# Altium PCB pcb.PcbDoc (part 5 of 6)
Units mm, origin at the board's own origin, x right, y up, seen from the top; angles counter-clockwise.
Board outline 85.44 x 182.72 mm, 2 copper layers (Top Layer, Bottom Layer); 68 components, 54 nets, 232 pads, 184 vias.
Unrouted connection lines stored in the file: 53.
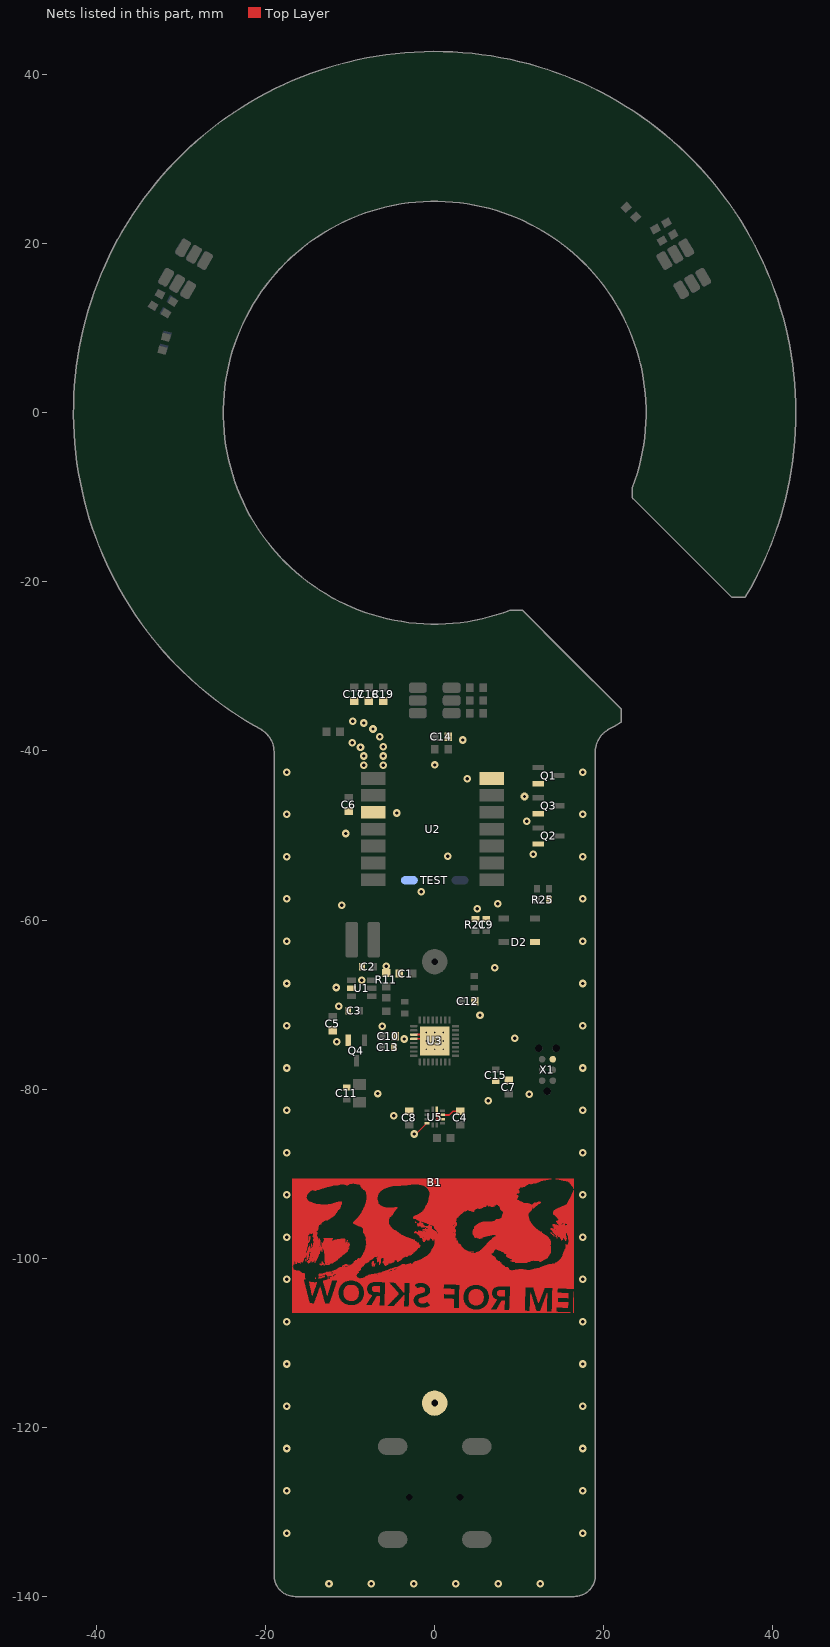
[diagram p5: the nets of this part, all layers, seen from the top]

## Via types
v1: diameter 0.9, hole 0.4, Top Layer to Bottom Layer, 143 vias
v2: diameter 1.27, hole 0.7, Top Layer to Bottom Layer, 32 vias
v3: diameter 0.5, hole 0.2, Top Layer to Bottom Layer, 9 vias

## Nets (pads, with @x,y where several pads share a name; then routed paths per layer and width w, separated by ;. In a path a pad name is that pad's centre, name@x,y a point inside that pad or via, vN(x,y) a via of type N, cw(c..) or ccw(c..) an arc to the next point about the centre after c; other vN are vias at no path point) (continued)
GND: (continued)
  Top Layer w0.025: 6.431,-98.035 13.721,-98.035 ; 6.456,-98.009 13.695,-98.009 ; 6.456,-93.691 7.066,-93.691 ; 6.482,-97.984 13.695,-97.984 ; 6.482,-93.717 7.066,-93.717 ; 6.507,-97.958 13.695,-97.958 ; 6.507,-93.742 7.066,-93.742 ; 6.533,-97.933 13.67,-97.933 ; 6.533,-93.767 7.066,-93.767 ; 6.558,-97.908 13.67,-97.908 ; 6.583,-97.882 13.67,-97.882 ; 6.609,-97.857 13.645,-97.857 ; 6.609,-93.793 7.041,-93.793 ; 6.66,-97.831 13.645,-97.831 ; 6.685,-97.806 13.619,-97.806 ; 6.71,-99.33 6.812,-99.33 ; 6.71,-93.818 6.888,-93.818 ; 6.736,-99.355 6.787,-99.355 ; 6.736,-99.305 6.837,-99.305 ; 6.736,-97.781 13.594,-97.781 ; 6.761,-99.279 6.914,-99.279 ; 6.761,-99.254 6.914,-99.254 ; 6.761,-99.228 6.939,-99.228 ; 6.761,-99.203 6.939,-99.203 ; 6.761,-97.755 13.594,-97.755 ; 6.761,-93.844 6.888,-93.844 ; 6.787,-97.73 13.568,-97.73 ; 6.787,-97.704 13.543,-97.704 ; 6.812,-97.679 13.518,-97.679 ; 6.812,-97.654 13.492,-97.654 ; 6.812,-97.628 13.492,-97.628 ; 6.837,-97.603 13.467,-97.603 ; 6.837,-93.869 6.888,-93.869 ; 6.888,-97.577 13.467,-97.577 ; 6.888,-95.647 11.282,-95.647 ; 6.914,-97.552 13.441,-97.552 ; 6.964,-97.527 13.416,-97.527 ; 6.964,-93.818 7.041,-93.818 ; 6.99,-97.501 13.391,-97.501 ; 6.99,-95.622 11.257,-95.622 ; 7.041,-97.476 13.391,-97.476 ; 7.066,-95.596 11.257,-95.596 ; 7.091,-95.571 11.232,-95.571 ; 7.117,-97.45 13.365,-97.45 ; 7.117,-93.64 7.218,-93.64 ; 7.142,-95.545 11.232,-95.545 ; 7.142,-93.666 7.168,-93.666 ; 7.168,-95.52 11.206,-95.52 ; 7.193,-95.495 11.206,-95.495 ; 7.218,-97.425 13.34,-97.425 ; 7.218,-97.323 13.187,-97.323 ; 7.218,-97.298 13.137,-97.298 ; 7.218,-95.469 11.206,-95.469 ; 7.244,-97.349 13.238,-97.349 ; 7.244,-97.273 13.111,-97.273 ; 7.244,-97.196 12.959,-97.196 ; 7.244,-95.444 11.181,-95.444 ; 7.269,-97.374 13.264,-97.374 ; 7.269,-97.247 13.06,-97.247 ; 7.269,-95.418 11.181,-95.418 ; 7.295,-97.4 13.289,-97.4 ; 7.295,-97.222 13.01,-97.222 ; 7.295,-95.393 11.155,-95.393 ; 7.32,-106.086 8.234,-106.086 ; 7.32,-106.061 8.234,-106.061 ; 7.32,-98.898 13.721,-98.898 ; 7.345,-106.036 8.234,-106.036 ; 7.345,-95.368 7.447,-95.368 ; 7.345,-93.564 11.232,-93.564 ; 7.371,-106.01 8.234,-106.01 ; 7.371,-105.985 8.234,-105.985 ; 7.396,-105.959 8.234,-105.959 ; 7.396,-105.934 8.234,-105.934 ; 7.396,-104.207 8.285,-104.207 ; 7.396,-104.181 8.285,-104.181 ; 7.396,-104.156 8.285,-104.156 ; 7.396,-104.131 8.285,-104.131 ; 7.396,-104.105 8.285,-104.105 ; 7.396,-104.08 8.285,-104.08 ; 7.396,-104.054 8.285,-104.054 ; 7.396,-104.029 8.285,-104.029 ; 7.396,-104.004 8.285,-104.004 ; 7.396,-98.924 13.721,-98.924 ; 7.422,-105.909 8.234,-105.909 ; 7.422,-105.883 8.234,-105.883 ; 7.422,-104.258 8.285,-104.258 ; 7.422,-104.232 8.285,-104.232 ; 7.422,-103.978 8.285,-103.978 ; 7.422,-103.953 8.285,-103.953 ; 7.422,-93.59 11.308,-93.59 ; 7.447,-105.858 8.234,-105.858 ; 7.447,-104.283 8.285,-104.283 ; 7.447,-103.927 8.311,-103.927 ; 7.447,-98.949 13.721,-98.949 ; 7.472,-105.832 8.234,-105.832 ; 7.472,-105.807 8.234,-105.807 ; 7.472,-104.308 8.285,-104.308 ; 7.472,-103.902 8.311,-103.902 ; 7.472,-93.615 11.384,-93.615 ; 7.498,-105.782 8.234,-105.782 ; 7.498,-105.756 8.234,-105.756 ; 7.498,-104.334 8.285,-104.334 ; 7.498,-103.877 8.311,-103.877 ; 7.498,-93.691 11.435,-93.691 ; 7.498,-93.666 11.46,-93.666 ; 7.498,-93.64 11.46,-93.64 ; 7.523,-105.731 8.234,-105.731 ; 7.523,-105.705 8.234,-105.705 ; 7.523,-104.359 8.285,-104.359 ; 7.523,-103.851 8.311,-103.851 ; 7.523,-98.974 13.721,-98.974 ; 7.523,-93.717 11.435,-93.717 ; 7.549,-105.68 8.234,-105.68 ; 7.549,-105.655 8.234,-105.655 ; 7.574,-105.629 8.234,-105.629 ; 7.574,-104.385 8.285,-104.385 ; 7.574,-103.826 8.311,-103.826 ; 7.599,-105.604 8.234,-105.604 ; 7.599,-105.578 8.234,-105.578 ; 7.599,-99 13.721,-99 ; 7.599,-93.742 11.435,-93.742 ; 7.625,-105.553 8.234,-105.553 ; 7.625,-105.528 8.234,-105.528 ; 7.65,-105.502 8.234,-105.502 ; 7.65,-105.477 8.234,-105.477 ; 7.65,-104.41 8.285,-104.41 ; 7.65,-103.8 8.285,-103.8 ; 7.65,-95.368 11.155,-95.368 ; 7.65,-93.767 11.409,-93.767 ; 7.676,-105.451 8.234,-105.451 ; 7.676,-99.025 13.721,-99.025 ; 7.676,-93.818 11.384,-93.818 ; 7.676,-93.793 11.409,-93.793 ; 7.701,-105.426 8.234,-105.426 ; 7.701,-105.401 8.234,-105.401 ; 7.701,-95.342 11.155,-95.342 ; 7.701,-93.894 11.359,-93.894 ; 7.701,-93.869 11.359,-93.869 ; 7.701,-93.844 11.384,-93.844 ; 7.726,-105.375 8.26,-105.375 ; 7.726,-105.35 8.26,-105.35 ; 7.726,-99.051 13.721,-99.051 ; 7.726,-93.971 11.333,-93.971 ; 7.726,-93.945 11.333,-93.945 ; 7.726,-93.92 11.333,-93.92 ; 7.752,-105.324 8.26,-105.324 ; 7.752,-105.299 8.26,-105.299 ; 7.752,-95.317 11.13,-95.317 ; 7.752,-94.047 11.308,-94.047 ; 7.752,-94.021 11.308,-94.021 ; 7.752,-93.996 11.308,-93.996 ; 7.777,-105.274 8.26,-105.274 ; 7.777,-99.076 13.721,-99.076 ; 7.777,-94.123 11.282,-94.123 ; 7.777,-94.098 11.282,-94.098 ; 7.777,-94.072 11.282,-94.072 ; 7.803,-105.248 8.26,-105.248 ; 7.803,-105.223 8.26,-105.223 ; 7.803,-95.291 11.13,-95.291 ; 7.803,-94.174 11.282,-94.174 ; 7.803,-94.148 11.282,-94.148 ; 7.828,-105.197 8.26,-105.197 ; 7.828,-105.172 8.26,-105.172 ; 7.828,-95.266 11.13,-95.266 ; 7.828,-94.225 11.435,-94.225 ; 7.828,-94.199 11.46,-94.199 ; 7.853,-105.147 8.26,-105.147 ; 7.853,-105.121 8.26,-105.121 ; 7.853,-99.101 13.721,-99.101 ; 7.853,-94.25 11.435,-94.25 ; 7.879,-105.096 8.26,-105.096 ; 7.879,-95.241 11.13,-95.241 ; 7.879,-94.275 11.435,-94.275 ; 7.904,-105.07 8.26,-105.07 ; 7.904,-105.045 8.26,-105.045 ; 7.904,-99.127 13.695,-99.127 ; 7.904,-95.215 11.105,-95.215 ; 7.904,-95.19 11.105,-95.19 ; 7.93,-105.02 8.26,-105.02 ; 7.93,-104.994 8.26,-104.994 ; 7.93,-104.435 8.285,-104.435 ; 7.93,-95.164 11.105,-95.164 ; 7.93,-94.301 11.409,-94.301 ; 7.955,-99.152 13.695,-99.152 ; 7.955,-95.139 11.105,-95.139 ; 7.955,-95.114 11.105,-95.114 ; 7.98,-95.088 11.079,-95.088 ; 7.98,-95.063 11.079,-95.063 ; 7.98,-95.037 11.079,-95.037 ; 7.98,-95.012 11.079,-95.012 ; 7.98,-94.987 11.079,-94.987 ; 7.98,-94.961 11.054,-94.961 ; 7.98,-94.936 11.054,-94.936 ; 7.98,-94.91 11.054,-94.91 ; 7.98,-94.326 11.384,-94.326 ; 8.006,-94.885 11.054,-94.885 ; 8.006,-94.86 11.054,-94.86 ; 8.006,-94.834 11.054,-94.834 ; 8.006,-94.352 11.333,-94.352 ; 8.031,-99.178 13.695,-99.178 ; 8.031,-94.809 11.054,-94.809 ; 8.031,-94.783 11.054,-94.783 ; 8.057,-94.758 11.054,-94.758 ; 8.057,-94.733 11.054,-94.733 ; 8.057,-94.707 11.054,-94.707 ; 8.057,-94.377 11.282,-94.377 ; 8.082,-94.682 11.079,-94.682 ; 8.082,-94.656 11.079,-94.656 ; 8.082,-94.631 11.079,-94.631 ; 8.082,-94.402 11.232,-94.402 ; 8.107,-99.203 13.695,-99.203 ; 8.107,-94.606 11.105,-94.606 ; 8.107,-94.58 11.105,-94.58 ; 8.107,-94.555 11.13,-94.555 ; 8.107,-94.529 11.155,-94.529 ; 8.107,-94.504 11.155,-94.504 ; 8.107,-94.479 11.181,-94.479 ; 8.107,-94.453 11.206,-94.453 ; 8.107,-94.428 11.232,-94.428 ; 8.234,-99.355 13.67,-99.355 ; 8.234,-99.33 13.67,-99.33 ; 8.234,-99.305 13.695,-99.305 ; 8.234,-99.279 13.721,-99.279 ; 8.26,-99.381 8.59,-99.381 ; 8.285,-99.406 8.539,-99.406 ; 8.285,-99.254 13.721,-99.254 ; 8.311,-99.432 8.412,-99.432 ; 8.311,-99.228 13.695,-99.228 ; 8.336,-103.267 16.464,-103.267 ; 8.488,-101.032 8.539,-101.032 ; 8.488,-99.711 13.441,-99.711 ; 8.488,-99.686 13.441,-99.686 ; 8.488,-99.66 13.467,-99.66 ; 8.488,-99.635 13.492,-99.635 ; 8.488,-99.609 13.492,-99.609 ; 8.488,-99.584 13.543,-99.584 ; 8.514,-101.057 8.565,-101.057 ; 8.514,-99.736 13.416,-99.736 ; 8.514,-99.559 13.568,-99.559 ; 8.539,-101.083 8.615,-101.083 ; 8.539,-99.533 13.568,-99.533 ; 8.539,-99.508 13.568,-99.508 ; 8.565,-99.762 13.416,-99.762 ; 8.565,-99.482 13.594,-99.482 ; 8.565,-99.457 13.594,-99.457 ; 8.59,-101.108 8.666,-101.108 ; 8.59,-99.787 13.391,-99.787 ; 8.59,-99.432 13.619,-99.432 ; 8.59,-99.406 13.645,-99.406 ; 8.615,-99.838 13.365,-99.838 ; 8.615,-99.813 13.365,-99.813 ; 8.615,-99.381 13.645,-99.381 ; 8.641,-101.133 8.717,-101.133 ; 8.641,-99.863 13.34,-99.863 ; 8.692,-101.159 8.742,-101.159 ; 8.793,-99.889 13.314,-99.889 ; 8.819,-99.94 13.264,-99.94 ; 8.819,-99.914 13.289,-99.914 ; 8.844,-106.137 10.622,-106.137 ; 8.844,-106.112 10.622,-106.112 ; 8.844,-106.086 10.622,-106.086 ; 8.844,-106.061 10.622,-106.061 ; 8.844,-106.036 10.622,-106.036 ; 8.844,-106.01 10.622,-106.01 ; 8.844,-105.985 10.622,-105.985 ; 8.844,-99.965 13.213,-99.965 ; 8.869,-105.959 10.622,-105.959 ; 8.869,-105.934 10.622,-105.934 ; 8.869,-105.909 10.622,-105.909 ; 8.869,-105.883 10.647,-105.883 ; 8.869,-105.858 10.647,-105.858 ; 8.869,-105.832 10.647,-105.832 ; 8.869,-105.807 10.647,-105.807 ; 8.869,-105.782 10.647,-105.782 ; 8.869,-105.756 10.647,-105.756 ; 8.869,-105.731 10.647,-105.731 ; 8.869,-105.705 10.647,-105.705 ; 8.869,-105.68 10.647,-105.68 ; 8.869,-105.655 10.647,-105.655 ; 8.869,-105.629 10.647,-105.629 ; 8.869,-105.604 10.647,-105.604 ; 8.869,-105.578 10.647,-105.578 ; 8.869,-105.553 10.647,-105.553 ; 8.869,-105.528 10.647,-105.528 ; 8.869,-105.502 10.647,-105.502 ; 8.869,-105.477 10.647,-105.477 ; 8.869,-105.451 10.647,-105.451 ; 8.869,-105.426 10.647,-105.426 ; 8.869,-105.401 10.647,-105.401 ; 8.869,-105.375 10.647,-105.375 ; 8.869,-105.35 10.647,-105.35 ; 8.869,-105.324 10.647,-105.324 ; 8.869,-105.299 10.647,-105.299 ; 8.869,-105.274 10.647,-105.274 ; 8.869,-105.248 10.647,-105.248 ; 8.895,-105.223 10.647,-105.223 ; 8.895,-105.197 10.647,-105.197 ; 8.895,-105.172 10.673,-105.172 ; 8.895,-105.147 10.673,-105.147 ; 8.895,-105.121 10.673,-105.121 ; 8.895,-105.096 10.673,-105.096 ; 8.895,-105.07 10.673,-105.07 ; 8.895,-105.045 10.673,-105.045 ; 8.895,-105.02 10.673,-105.02 ; 8.895,-104.994 10.673,-104.994 ; 8.895,-104.969 10.673,-104.969 ; 8.895,-104.943 10.673,-104.943 ; 8.895,-104.918 10.673,-104.918 ; 8.895,-104.893 10.673,-104.893 ; 8.895,-104.867 10.673,-104.867 ; 8.895,-104.842 10.673,-104.842 ; 8.895,-104.816 10.673,-104.816 ; 8.895,-104.791 10.673,-104.791 ; 8.895,-104.766 10.673,-104.766 ; 8.895,-104.74 10.673,-104.74 ; 8.895,-104.715 10.673,-104.715 ; 8.895,-104.689 10.673,-104.689 ; 8.895,-104.664 10.673,-104.664 ; 8.895,-104.639 10.673,-104.639 ; 8.895,-104.613 10.673,-104.613 ; 8.895,-104.588 10.673,-104.588 ; 8.895,-104.562 10.673,-104.562 ; 8.895,-104.537 10.673,-104.537 ; 8.895,-104.512 10.673,-104.512 ; 8.92,-104.486 10.673,-104.486 ; 8.92,-104.461 10.673,-104.461 ; 8.92,-104.435 10.698,-104.435 ; 8.92,-104.41 10.698,-104.41 ; 8.92,-104.385 10.698,-104.385 ; 8.92,-104.359 10.698,-104.359 ; 8.92,-104.334 10.698,-104.334 ; 8.92,-104.308 10.698,-104.308 ; 8.92,-104.283 10.698,-104.283 ; 8.92,-104.258 10.698,-104.258 ; 8.92,-104.232 10.698,-104.232 ; 8.92,-104.207 10.698,-104.207 ; 8.92,-104.181 10.698,-104.181 ; 8.92,-104.156 10.698,-104.156 ; 8.92,-104.131 10.698,-104.131 ; 8.92,-104.105 10.698,-104.105 ; 8.92,-104.08 10.698,-104.08 ; 8.92,-104.054 10.698,-104.054 ; 8.92,-104.029 10.698,-104.029 ; 8.92,-104.004 10.698,-104.004 ; 8.92,-103.978 10.698,-103.978 ; 8.92,-103.953 10.698,-103.953 ; 8.92,-103.927 10.698,-103.927 ; 8.92,-103.902 10.698,-103.902 ; 8.92,-103.877 10.698,-103.877 ; 8.92,-103.851 10.698,-103.851 ; 8.92,-103.826 10.698,-103.826 ; 8.92,-103.8 10.698,-103.8 ; 8.92,-99.99 13.187,-99.99 ; 8.946,-103.775 10.698,-103.775 ; 8.946,-103.75 10.698,-103.75 ; 8.946,-103.724 10.698,-103.724 ; 8.946,-103.699 10.724,-103.699 ; 8.946,-103.673 10.724,-103.673 ; 8.946,-103.648 10.724,-103.648 ; 8.946,-103.623 10.724,-103.623 ; 8.946,-103.597 10.724,-103.597 ; 8.946,-103.572 10.724,-103.572 ; 8.946,-103.546 10.724,-103.546 ; 8.946,-103.521 10.724,-103.521 ; 8.946,-103.496 10.724,-103.496 ; 8.946,-103.47 10.724,-103.47 ; 8.946,-103.445 10.724,-103.445 ; 8.946,-103.419 10.724,-103.419 ; 8.946,-103.394 10.724,-103.394 ; 8.946,-103.369 10.724,-103.369 ; 8.946,-103.343 16.464,-103.343 ; 8.946,-103.318 16.464,-103.318 ; 8.946,-103.292 16.464,-103.292 ; 9.022,-100.27 9.047,-100.27 ; 9.022,-100.244 9.047,-100.244 ; 9.022,-100.016 13.137,-100.016 ; 9.098,-100.295 9.327,-100.295 ; 9.098,-100.041 13.086,-100.041 ; 9.123,-100.27 11.384,-100.27 ; 9.149,-100.244 11.486,-100.244 ; 9.149,-100.219 11.613,-100.219 ; 9.149,-100.194 12.781,-100.194 ; 9.149,-100.168 12.806,-100.168 ; 9.149,-100.143 12.857,-100.143 ; 9.149,-100.117 12.908,-100.117 ; 9.149,-100.092 12.984,-100.092 ; 9.149,-100.067 13.06,-100.067 ; 9.174,-100.321 9.327,-100.321 ; 9.25,-101.387 9.276,-101.387 ; 9.25,-100.346 9.301,-100.346 ; 9.276,-101.413 9.327,-101.413 ; 9.352,-101.438 9.555,-101.438 ; 9.377,-101.464 16.464,-101.464 ; 9.403,-100.295 11.308,-100.295 ; 9.428,-100.321 11.232,-100.321 ; 9.454,-101.489 16.464,-101.489 ; 9.479,-100.346 11.155,-100.346 ; 9.504,-101.514 16.464,-101.514 ; 9.53,-100.371 11.079,-100.371 ; 9.555,-101.387 16.464,-101.387 ; 9.555,-101.362 10.825,-101.362 ; 9.555,-100.448 10.901,-100.448 ; 9.555,-100.422 10.978,-100.422 ; 9.555,-100.397 11.028,-100.397 ; 9.631,-101.413 16.464,-101.413 ; 9.657,-101.438 16.464,-101.438 ; 9.835,-100.473 10.47,-100.473 ; 9.86,-101.337 10.597,-101.337 ; 9.962,-101.311 10.47,-101.311 ; 10.114,-101.286 10.393,-101.286 ; 10.266,-91.558 10.317,-91.558 ; 11.257,-106.213 11.994,-106.213 ; 11.257,-106.188 11.994,-106.188 ; 11.257,-106.163 11.994,-106.163 ; 11.257,-106.137 11.968,-106.137 ; 11.257,-106.112 11.968,-106.112 ; 11.257,-106.086 11.968,-106.086 ; 11.257,-106.061 11.943,-106.061 ; 11.257,-106.036 11.943,-106.036 ; 11.257,-106.01 11.943,-106.01 ; 11.257,-105.985 11.917,-105.985 ; 11.257,-105.959 11.917,-105.959 ; 11.257,-105.934 11.917,-105.934 ; 11.257,-105.909 11.917,-105.909 ; 11.257,-105.883 11.892,-105.883 ; 11.257,-105.858 11.892,-105.858 ; 11.257,-105.832 11.892,-105.832 ; 11.257,-105.807 11.867,-105.807 ; 11.257,-105.782 11.867,-105.782 ; 11.257,-105.756 11.867,-105.756 ; 11.257,-103.369 16.464,-103.369 ; 11.257,-91.1 11.613,-91.1 ; 11.282,-105.731 11.841,-105.731 ; 11.282,-105.705 11.841,-105.705 ; 11.282,-105.68 11.841,-105.68 ; 11.282,-105.655 11.841,-105.655 ; 11.282,-105.629 11.816,-105.629 ; 11.282,-105.604 11.816,-105.604 ; 11.282,-105.578 11.816,-105.578 ; 11.282,-105.553 11.79,-105.553 ; 11.282,-105.528 11.79,-105.528 ; 11.282,-105.502 11.79,-105.502 ; 11.282,-105.477 11.765,-105.477 ; 11.282,-105.451 11.765,-105.451 ; 11.282,-105.426 11.765,-105.426 ; 11.282,-105.401 11.74,-105.401 ; 11.282,-105.375 11.74,-105.375 ; 11.282,-105.35 11.74,-105.35 ; 11.282,-105.324 11.74,-105.324 ; 11.282,-105.299 11.714,-105.299 ; 11.282,-105.274 11.714,-105.274 ; 11.282,-105.248 11.714,-105.248 ; 11.282,-105.223 11.689,-105.223 ; 11.282,-105.197 11.689,-105.197 ; 11.282,-105.172 11.689,-105.172 ; 11.282,-105.147 11.663,-105.147 ; 11.282,-105.121 11.663,-105.121 ; 11.282,-105.096 11.663,-105.096 ; 11.282,-105.07 11.663,-105.07 ; 11.282,-105.045 11.638,-105.045 ; 11.308,-105.02 11.638,-105.02 ; 11.308,-104.994 11.638,-104.994 ; 11.308,-104.969 11.613,-104.969 ; 11.308,-104.943 11.613,-104.943 ; 11.308,-104.918 11.613,-104.918 ; 11.308,-104.893 11.587,-104.893 ; 11.308,-104.867 11.587,-104.867 ; 11.308,-104.842 11.587,-104.842 ; 11.308,-104.816 11.562,-104.816 ; 11.308,-104.791 11.562,-104.791 ; 11.308,-104.766 11.562,-104.766 ; 11.308,-104.74 11.562,-104.74 ; 11.308,-104.715 11.536,-104.715 ; 11.308,-104.689 11.536,-104.689 ; 11.308,-104.664 11.536,-104.664 ; 11.308,-104.639 11.511,-104.639 ; 11.308,-104.613 11.511,-104.613 ; 11.308,-104.588 11.511,-104.588 ; 11.308,-104.562 11.486,-104.562 ; 11.308,-104.537 11.486,-104.537 ; 11.308,-104.512 11.486,-104.512 ; 11.308,-104.486 11.486,-104.486 ; 11.308,-104.461 11.46,-104.461 ; 11.308,-104.435 11.46,-104.435 ; 11.308,-104.41 11.46,-104.41 ; 11.308,-104.385 11.435,-104.385 ; 11.308,-104.359 11.435,-104.359 ; 11.308,-104.334 11.435,-104.334 ; 11.308,-104.308 11.409,-104.308 ; 11.308,-94.174 11.46,-94.174 ; 11.308,-94.148 11.486,-94.148 ; 11.308,-91.126 11.536,-91.126 ; 11.333,-104.283 11.409,-104.283 ; 11.333,-104.258 11.409,-104.258 ; 11.333,-104.232 11.409,-104.232 ; 11.333,-104.207 11.384,-104.207 ; 11.333,-104.181 11.384,-104.181 ; 11.333,-104.156 11.384,-104.156 ; 11.333,-104.131 11.359,-104.131 ; 11.333,-104.105 11.359,-104.105 ; 11.333,-104.08 11.359,-104.08 ; 11.333,-101.362 16.464,-101.362 ; 11.333,-94.123 11.486,-94.123 ; 11.333,-94.098 11.486,-94.098 ; 11.333,-94.072 11.511,-94.072 ; 11.359,-94.047 11.511,-94.047 ; 11.359,-94.021 11.536,-94.021 ; 11.359,-91.151 11.486,-91.151 ; 11.384,-93.996 11.536,-93.996 ; 11.384,-93.971 11.536,-93.971 ; 11.384,-91.177 11.435,-91.177 ; 11.409,-93.945 11.562,-93.945 ; 11.409,-93.92 11.562,-93.92 ; 11.409,-93.894 11.587,-93.894 ; 11.435,-93.869 11.841,-93.869 ; 11.435,-93.844 11.892,-93.844 ; 11.46,-101.337 16.464,-101.337 ; 11.46,-93.818 11.917,-93.818 ; 11.46,-93.793 11.943,-93.793 ; 11.486,-93.767 11.968,-93.767 ; 11.486,-93.742 12.019,-93.742 ; 11.511,-93.717 12.044,-93.717 ; 11.536,-93.691 12.07,-93.691 ; 11.536,-93.666 12.095,-93.666 ; 11.562,-93.64 12.146,-93.64 ; 11.587,-101.311 16.464,-101.311 ; 11.587,-93.615 12.171,-93.615 ; 11.613,-93.59 12.197,-93.59 ; 11.638,-93.894 11.816,-93.894 ; 11.638,-93.564 12.248,-93.564 ; 11.663,-103.394 16.464,-103.394 ; 11.663,-93.996 11.689,-93.996 ; 11.663,-93.971 11.74,-93.971 ; 11.663,-93.945 11.765,-93.945 ; 11.663,-93.92 11.79,-93.92 ; 11.663,-93.539 12.273,-93.539 ; 11.689,-103.47 12.984,-103.47 ; 11.689,-103.445 12.984,-103.445 ; 11.689,-103.419 16.464,-103.419 ; 11.689,-101.286 16.464,-101.286 ; 11.689,-93.513 12.324,-93.513 ; 11.714,-103.546 12.959,-103.546 ; 11.714,-103.521 12.959,-103.521 ; 11.714,-103.496 12.984,-103.496 ; 11.714,-100.219 12.756,-100.219 ; 11.714,-93.488 12.349,-93.488 ; 11.74,-103.623 12.933,-103.623 ; 11.74,-103.597 12.933,-103.597 ; 11.74,-103.572 12.933,-103.572 ; 11.74,-93.463 12.4,-93.463 ; 11.74,-91.075 11.943,-91.075 ; 11.765,-103.699 12.883,-103.699 ; 11.765,-103.673 12.908,-103.673 ; 11.765,-103.648 12.908,-103.648 ; 11.765,-100.244 12.044,-100.244 ; 11.79,-103.8 12.857,-103.8 ; 11.79,-103.775 12.857,-103.775 ; 11.79,-103.75 12.883,-103.75 ; 11.79,-103.724 12.883,-103.724 ; 11.79,-101.26 16.464,-101.26 ; 11.79,-93.437 12.425,-93.437 ; 11.816,-103.877 12.832,-103.877 ; 11.816,-103.851 12.832,-103.851 ; 11.816,-103.826 12.832,-103.826 ; 11.841,-103.953 12.781,-103.953 ; 11.841,-103.927 12.806,-103.927 ; 11.841,-103.902 12.806,-103.902 ; 11.867,-104.029 12.756,-104.029 ; 11.867,-104.004 12.781,-104.004 ; 11.867,-103.978 12.781,-103.978 ; 11.867,-93.412 12.476,-93.412 ; 11.892,-104.105 12.73,-104.105 ; 11.892,-104.08 12.73,-104.08 ; 11.892,-104.054 12.756,-104.054 ; 11.892,-101.235 16.464,-101.235 ; 11.917,-104.181 12.705,-104.181 ; 11.917,-104.156 12.705,-104.156 ; 11.917,-104.131 12.73,-104.131 ; 11.943,-104.258 12.679,-104.258 ; 11.943,-104.232 12.679,-104.232 ; 11.943,-104.207 12.705,-104.207 ; 11.968,-104.359 12.629,-104.359 ; 11.968,-104.334 12.654,-104.334 ; 11.968,-104.308 12.654,-104.308 ; 11.968,-104.283 12.654,-104.283 ; 11.994,-104.435 12.603,-104.435 ; 11.994,-104.41 12.603,-104.41 ; 11.994,-104.385 12.629,-104.385 ; 11.994,-101.21 16.464,-101.21 ; 12.019,-104.512 12.578,-104.512 ; 12.019,-104.486 12.578,-104.486 ; 12.019,-104.461 12.603,-104.461 ; 12.044,-104.588 12.552,-104.588 ; 12.044,-104.562 12.552,-104.562 ; 12.044,-104.537 12.552,-104.537 ; 12.07,-104.664 12.502,-104.664 ; 12.07,-104.639 12.527,-104.639 ; 12.07,-104.613 12.527,-104.613 ; 12.095,-104.74 12.476,-104.74 ; 12.095,-104.715 12.502,-104.715 ; 12.095,-104.689 12.502,-104.689 ; 12.095,-101.184 16.464,-101.184 ; 12.121,-104.842 12.451,-104.842 ; 12.121,-104.816 12.451,-104.816 ; 12.121,-104.791 12.451,-104.791 ; 12.121,-104.766 12.476,-104.766 ; 12.121,-93.386 12.527,-93.386 ; 12.146,-104.918 12.425,-104.918 ; 12.146,-104.893 12.425,-104.893 ; 12.146,-104.867 12.425,-104.867 ; 12.146,-93.361 12.552,-93.361 ; 12.171,-104.994 12.375,-104.994 ; 12.171,-104.969 12.4,-104.969 ; 12.171,-104.943 12.4,-104.943 ; 12.197,-105.07 12.349,-105.07 ; 12.197,-105.045 12.375,-105.045 ; 12.197,-105.02 12.375,-105.02 ; 12.197,-101.159 12.375,-101.159 ; 12.222,-105.147 12.324,-105.147 ; 12.222,-105.121 12.324,-105.121 ; 12.222,-105.096 12.349,-105.096 ; 12.222,-93.336 12.502,-93.336 ; 12.248,-105.223 12.298,-105.223 ; 12.248,-105.197 12.298,-105.197 ; 12.248,-105.172 12.324,-105.172 ; 12.273,-93.31 12.4,-93.31 ; 12.324,-100.244 12.73,-100.244 ; 12.375,-100.27 12.679,-100.27 ; 12.425,-100.295 12.603,-100.295 ; 12.451,-101.159 16.464,-101.159 ; 12.451,-101.133 16.464,-101.133 ; 12.451,-101.108 16.464,-101.108 ; 12.451,-100.321 12.527,-100.321 ; 12.476,-106.264 13.213,-106.264 ; 12.476,-101.083 16.464,-101.083 ; 12.502,-106.239 13.213,-106.239 ; 12.502,-106.213 13.213,-106.213 ; 12.527,-106.188 13.213,-106.188 ; 12.527,-106.163 13.213,-106.163 ; 12.527,-106.137 13.238,-106.137 ; 12.527,-101.057 16.464,-101.057 ; 12.552,-106.112 13.238,-106.112 ; 12.552,-106.086 13.238,-106.086 ; 12.578,-106.061 13.238,-106.061 ; 12.578,-106.036 13.238,-106.036 ; 12.578,-106.01 13.238,-106.01 ; 12.603,-105.985 13.238,-105.985 ; 12.603,-105.959 13.238,-105.959 ; 12.603,-105.934 13.238,-105.934 ; 12.603,-101.032 16.464,-101.032 ; 12.629,-105.909 13.238,-105.909 ; 12.629,-105.883 13.238,-105.883 ; 12.629,-96.866 12.654,-96.866 ; 12.654,-105.858 13.238,-105.858 ; 12.654,-105.832 13.238,-105.832 ; 12.654,-105.807 13.238,-105.807 ; 12.679,-105.782 13.238,-105.782 ; 12.679,-105.756 13.238,-105.756 ; 12.679,-105.731 13.238,-105.731 ; 12.679,-101.006 16.464,-101.006 ; 12.705,-105.705 13.238,-105.705 ; 12.705,-105.68 13.238,-105.68 ; 12.705,-105.655 13.238,-105.655 ; 12.73,-105.629 13.238,-105.629 ; 12.73,-105.604 13.238,-105.604 ; 12.73,-100.981 16.464,-100.981 ; 12.756,-105.578 13.238,-105.578 ; 12.756,-105.553 13.238,-105.553 ; 12.756,-105.528 13.238,-105.528 ; 12.781,-105.502 13.238,-105.502 ; 12.781,-105.477 13.238,-105.477 ; 12.781,-105.451 13.238,-105.451 ; 12.806,-105.426 13.238,-105.426 ; 12.806,-105.401 13.264,-105.401 ; 12.806,-100.956 16.464,-100.956 ; 12.832,-105.375 13.264,-105.375 ; 12.832,-105.35 13.264,-105.35 ; 12.832,-105.324 13.264,-105.324 ; 12.857,-105.299 13.264,-105.299 ; 12.857,-105.274 13.264,-105.274 ; 12.857,-105.248 13.264,-105.248 ; 12.883,-105.223 13.264,-105.223 ; 12.883,-105.197 13.264,-105.197 ; 12.883,-105.172 13.264,-105.172 ; 12.883,-100.93 16.464,-100.93 ; 12.908,-105.147 13.264,-105.147 ; 12.908,-105.121 13.264,-105.121 ; 12.933,-105.096 13.264,-105.096 ; 12.933,-105.07 13.264,-105.07 ; 12.933,-105.045 13.264,-105.045 ; 12.959,-105.02 13.264,-105.02 ; 12.959,-104.994 13.264,-104.994 ; 12.959,-104.969 13.264,-104.969 ; 12.959,-100.905 16.464,-100.905 ; 12.984,-104.943 13.264,-104.943 ; 12.984,-104.918 13.264,-104.918 ; 13.01,-104.893 13.264,-104.893 ; 13.01,-104.867 13.264,-104.867 ; 13.01,-104.842 13.264,-104.842 ; 13.035,-104.816 13.264,-104.816 ; 13.035,-104.791 13.264,-104.791 ; 13.035,-104.766 13.264,-104.766 ; 13.035,-100.879 16.464,-100.879 ; 13.06,-104.74 13.264,-104.74 ; 13.06,-104.715 13.264,-104.715 ; 13.086,-104.689 13.264,-104.689 ; 13.086,-104.664 13.289,-104.664 ; 13.086,-104.639 13.289,-104.639 ; 13.086,-100.854 16.464,-100.854 ; 13.111,-104.613 13.289,-104.613 ; 13.111,-104.588 13.289,-104.588 ; 13.111,-104.562 13.289,-104.562 ; 13.137,-104.537 13.289,-104.537 ; 13.137,-104.512 13.289,-104.512 ; 13.137,-104.486 13.289,-104.486 ; 13.162,-104.461 13.289,-104.461 ; 13.162,-104.435 13.289,-104.435 ; 13.162,-100.829 16.464,-100.829 ; 13.187,-104.41 13.289,-104.41 ; 13.187,-104.385 13.289,-104.385 ; 13.187,-104.359 13.289,-104.359 ; 13.213,-104.334 13.289,-104.334 ; 13.213,-104.308 13.289,-104.308 ; 13.213,-104.283 13.289,-104.283 ; 13.213,-100.803 16.464,-100.803 ; 13.238,-104.258 13.289,-104.258 ; 13.238,-104.232 13.289,-104.232 ; 13.264,-104.207 13.289,-104.207 ; 13.264,-104.181 13.289,-104.181 ; 13.264,-104.156 13.289,-104.156 ; 13.314,-100.778 13.391,-100.778 ; 13.416,-103.445 16.464,-103.445 ; 13.416,-100.778 16.464,-100.778 ; 13.441,-100.752 16.464,-100.752 ; 13.492,-100.727 16.464,-100.727 ; 13.492,-98.568 13.695,-98.568 ; 13.543,-100.702 16.464,-100.702 ; 13.594,-98.543 13.67,-98.543 ; 13.645,-100.676 16.464,-100.676 ; 13.721,-96.968 13.797,-96.968 ; 13.721,-96.511 14,-96.511 ; 13.721,-96.485 13.924,-96.485 ; 13.746,-96.993 13.797,-96.993 ; 13.746,-96.942 13.772,-96.942 ; 13.746,-96.536 14.102,-96.536 ; 13.746,-96.46 13.924,-96.46 ; 13.746,-96.434 13.924,-96.434 ; 13.772,-96.561 14.153,-96.561 ; 13.797,-97.019 13.822,-97.019 ; 13.822,-96.587 14.178,-96.587 ; 13.848,-106.315 14.356,-106.315 ; 13.848,-106.29 14.356,-106.29 ; 13.848,-106.264 14.356,-106.264 ; 13.848,-106.239 14.356,-106.239 ; 13.848,-106.213 14.356,-106.213 ; 13.848,-106.188 14.356,-106.188 ; 13.848,-106.163 14.356,-106.163 ; 13.848,-106.137 14.356,-106.137 ; 13.848,-106.112 14.356,-106.112 ; 13.848,-106.086 14.356,-106.086 ; 13.848,-106.061 14.356,-106.061 ; 13.848,-106.036 14.356,-106.036 ; 13.848,-106.01 14.356,-106.01 ; 13.848,-96.612 14.178,-96.612 ; 13.873,-105.985 14.356,-105.985 ; 13.873,-105.959 14.356,-105.959 ; 13.873,-105.934 14.356,-105.934 ; 13.873,-105.909 14.356,-105.909 ; 13.873,-105.883 14.381,-105.883 ; 13.873,-105.858 14.381,-105.858 ; 13.873,-105.832 14.381,-105.832 ; 13.873,-105.807 14.381,-105.807 ; 13.873,-105.782 14.381,-105.782 ; 13.873,-105.756 14.381,-105.756 ; 13.873,-105.731 15.753,-105.731 ; 13.873,-105.705 15.753,-105.705 ; 13.873,-105.68 15.753,-105.68 ; 13.873,-105.655 15.753,-105.655 ; 13.873,-105.629 15.753,-105.629 ; 13.873,-105.604 15.753,-105.604 ; 13.873,-105.578 15.753,-105.578 ; 13.873,-105.553 15.753,-105.553 ; 13.873,-105.528 15.753,-105.528 ; 13.873,-105.502 15.778,-105.502 ; 13.873,-105.477 15.778,-105.477 ; 13.873,-105.451 15.778,-105.451 ; 13.873,-105.426 15.778,-105.426 ; 13.873,-105.401 15.778,-105.401 ; 13.873,-105.375 15.778,-105.375 ; 13.873,-105.35 15.778,-105.35 ; 13.873,-105.324 15.778,-105.324 ; 13.873,-105.299 15.778,-105.299 ; 13.873,-105.274 15.778,-105.274 ; 13.873,-97.095 13.924,-97.095 ; 13.873,-96.638 14.178,-96.638 ; 13.899,-105.248 15.778,-105.248 ; 13.899,-105.223 15.778,-105.223 ; 13.899,-105.197 15.092,-105.197 ; 13.899,-105.172 14.534,-105.172 ; 13.899,-105.147 14.534,-105.147 ; 13.899,-105.121 14.534,-105.121 ; 13.899,-105.096 14.534,-105.096 ; 13.899,-105.07 14.534,-105.07 ; 13.899,-105.045 14.534,-105.045 ; 13.899,-105.02 14.534,-105.02 ; 13.899,-104.994 14.534,-104.994 ; 13.899,-104.969 14.534,-104.969 ; 13.899,-104.943 14.559,-104.943 ; 13.899,-104.918 14.559,-104.918 ; 13.899,-104.893 14.559,-104.893 ; 13.899,-104.867 14.559,-104.867 ; 13.899,-104.842 14.559,-104.842 ; 13.899,-104.816 14.559,-104.816 ; 13.899,-104.791 14.559,-104.791 ; 13.899,-104.766 14.559,-104.766 ; 13.899,-104.74 14.559,-104.74 ; 13.899,-104.715 14.559,-104.715 ; 13.899,-104.689 14.559,-104.689 ; 13.899,-104.664 14.559,-104.664 ; 13.899,-104.639 14.559,-104.639 ; 13.899,-104.613 14.559,-104.613 ; 13.899,-104.588 15.804,-104.588 ; 13.899,-104.562 15.804,-104.562 ; 13.899,-104.537 15.804,-104.537 ; 13.899,-97.146 13.949,-97.146 ; 13.899,-97.12 13.924,-97.12 ; 13.899,-96.663 14.178,-96.663 ; 13.924,-104.512 15.804,-104.512 ; 13.924,-104.486 15.804,-104.486 ; 13.924,-104.461 15.804,-104.461 ; 13.924,-104.435 15.804,-104.435 ; 13.924,-104.41 15.804,-104.41 ; 13.924,-104.385 15.804,-104.385 ; 13.924,-104.359 15.804,-104.359 ; 13.924,-104.334 15.804,-104.334 ; 13.924,-104.308 15.804,-104.308 ; 13.924,-104.283 15.804,-104.283 ; 13.924,-104.258 15.804,-104.258 ; 13.924,-104.232 15.804,-104.232 ; 13.924,-104.207 15.804,-104.207 ; 13.924,-104.181 15.804,-104.181 ; 13.924,-104.156 15.804,-104.156 ; 13.924,-104.131 15.804,-104.131 ; 13.924,-104.105 15.702,-104.105 ; 13.924,-104.08 14.965,-104.08 ; 13.924,-104.054 14.508,-104.054 ; 13.924,-104.029 14.508,-104.029 ; 13.924,-104.004 14.508,-104.004 ; 13.924,-103.978 14.508,-103.978 ; 13.924,-103.953 14.508,-103.953 ; 13.924,-103.927 14.508,-103.927 ; 13.924,-103.902 14.508,-103.902 ; 13.924,-103.877 14.508,-103.877 ; 13.924,-103.851 14.508,-103.851 ; 13.924,-103.826 14.508,-103.826 ; 13.924,-100.651 16.464,-100.651 ; 13.924,-96.688 15.829,-96.688 ; 13.949,-103.8 14.508,-103.8 ; 13.949,-103.775 14.508,-103.775 ; 13.949,-103.75 14.508,-103.75 ; 13.949,-103.724 14.508,-103.724 ; 13.949,-103.699 14.508,-103.699 ; 13.949,-103.673 14.508,-103.673 ; 13.949,-103.648 14.508,-103.648 ; 13.949,-103.623 14.508,-103.623 ; 13.949,-103.597 14.534,-103.597 ; 13.949,-103.572 14.534,-103.572 ; 13.949,-103.546 14.534,-103.546 ; 13.949,-103.521 14.534,-103.521 ; 13.949,-103.496 14.534,-103.496 ; 13.949,-103.47 16.464,-103.47 ; 13.949,-100.625 14.102,-100.625 ; 13.949,-96.714 15.829,-96.714 ; 13.949,-96.079 14.483,-96.079 ; 13.949,-96.053 14.432,-96.053 ; 13.949,-96.028 14.407,-96.028 ; 13.949,-96.003 14.203,-96.003 ; 13.949,-95.977 14.102,-95.977 ; 13.975,-96.866 14.076,-96.866 ; 13.975,-96.841 16.464,-96.841 ; 13.975,-96.765 16.464,-96.765 ; 13.975,-96.739 15.854,-96.739 ; 13.975,-96.13 14.61,-96.13 ; 13.975,-96.104 14.534,-96.104 ; 13.975,-95.952 14,-95.952 ; 14,-96.892 14.076,-96.892 ; 14,-96.815 16.464,-96.815 ; 14,-96.79 16.464,-96.79 ; 14,-96.155 14.737,-96.155 ; 14,-94.631 16.464,-94.631 ; 14,-94.606 16.464,-94.606 ; 14,-94.58 16.464,-94.58 ; 14,-94.555 16.464,-94.555 ; 14,-94.529 16.464,-94.529 ; 14,-94.504 16.464,-94.504 ; 14.026,-97.222 14.127,-97.222 ; 14.026,-97.196 14.102,-97.196 ; 14.026,-96.18 15.524,-96.18 ; 14.026,-94.707 16.464,-94.707 ; 14.026,-94.682 16.464,-94.682 ; 14.026,-94.656 16.464,-94.656 ; 14.026,-94.479 16.464,-94.479 ; 14.051,-97.273 14.127,-97.273 ; 14.051,-97.247 14.127,-97.247 ; 14.051,-97.171 14.076,-97.171 ; 14.051,-96.409 14.102,-96.409 ; 14.051,-96.206 15.55,-96.206 ; 14.051,-94.783 16.464,-94.783 ; 14.051,-94.758 16.464,-94.758 ; 14.051,-94.733 16.464,-94.733 ; 14.051,-94.453 16.464,-94.453 ; 14.051,-94.428 16.464,-94.428 ; 14.076,-97.323 14.127,-97.323 ; 14.076,-97.298 14.127,-97.298 ; 14.076,-96.434 14.102,-96.434 ; 14.076,-96.231 15.6,-96.231 ; 14.076,-94.834 14.102,-94.834 ; 14.076,-94.809 14.102,-94.809 ; 14.076,-94.402 16.464,-94.402 ; 14.102,-96.993 14.203,-96.993 ; 14.102,-96.968 14.153,-96.968 ; 14.102,-96.257 15.626,-96.257 ; 14.102,-94.377 16.464,-94.377 ; 14.127,-100.625 16.464,-100.625 ; 14.127,-97.019 14.229,-97.019 ; 14.127,-96.866 16.464,-96.866 ; 14.127,-96.46 14.407,-96.46 ; 14.127,-96.434 14.407,-96.434 ; 14.127,-96.282 15.804,-96.282 ; 14.127,-94.352 16.464,-94.352 ; 14.153,-96.485 15.27,-96.485 ; 14.153,-96.409 14.407,-96.409 ; 14.153,-96.384 14.407,-96.384 ; 14.153,-96.358 16.464,-96.358 ; 14.153,-96.333 15.88,-96.333 ; 14.153,-96.307 15.804,-96.307 ; 14.153,-94.809 16.464,-94.809 ; 14.153,-94.326 16.464,-94.326 ; 14.178,-97.044 15.473,-97.044 ; 14.178,-96.892 16.464,-96.892 ; 14.178,-94.834 16.464,-94.834 ; 14.178,-94.301 16.464,-94.301 ; 14.203,-96.917 16.464,-96.917 ; 14.203,-94.86 16.464,-94.86 ; 14.229,-100.6 16.464,-100.6 ; 14.229,-100.575 16.464,-100.575 ; 14.229,-97.095 15.473,-97.095 ; 14.229,-97.069 15.473,-97.069 ; 14.229,-96.942 15.6,-96.942 ; 14.229,-96.511 15.296,-96.511 ; 14.229,-94.885 16.464,-94.885 ; 14.229,-94.275 16.464,-94.275 ; 14.254,-97.12 15.473,-97.12 ; 14.254,-96.993 15.55,-96.993 ; 14.254,-96.968 15.575,-96.968 ; 14.254,-94.91 16.464,-94.91 ; 14.28,-100.549 16.464,-100.549 ; 14.28,-97.146 15.473,-97.146 ; 14.28,-97.019 15.499,-97.019 ; 14.28,-94.936 16.464,-94.936 ; 14.28,-94.25 16.464,-94.25 ; 14.305,-97.323 14.33,-97.323 ; 14.305,-97.171 14.356,-97.171 ; 14.305,-94.961 16.464,-94.961 ; 14.305,-90.592 16.464,-90.592 ; 14.33,-100.524 16.464,-100.524 ; 14.33,-97.374 14.381,-97.374 ; 14.33,-97.349 14.356,-97.349 ; 14.33,-96.536 15.321,-96.536 ; 14.33,-94.225 16.464,-94.225 ; 14.356,-97.4 14.407,-97.4 ; 14.356,-95.622 14.94,-95.622 ; 14.356,-94.987 16.464,-94.987 ; 14.356,-94.199 16.464,-94.199 ; 14.381,-100.498 16.464,-100.498 ; 14.381,-97.247 14.457,-97.247 ; 14.381,-97.222 14.508,-97.222 ; 14.381,-97.196 14.61,-97.196 ; 14.381,-97.171 15.473,-97.171 ; 14.381,-95.647 14.762,-95.647 ; 14.381,-95.596 14.915,-95.596 ; 14.381,-95.012 16.464,-95.012 ; 14.407,-96.663 15.804,-96.663 ; 14.407,-96.638 15.804,-96.638 ; 14.407,-96.612 15.346,-96.612 ; 14.407,-96.587 15.346,-96.587 ; 14.407,-96.561 15.321,-96.561 ; 14.407,-95.672 14.788,-95.672 ; 14.407,-95.037 16.464,-95.037 ; 14.407,-94.174 16.464,-94.174 ; 14.432,-100.473 16.464,-100.473 ; 14.432,-95.571 14.635,-95.571 ; 14.432,-95.063 16.464,-95.063 ; 14.457,-105.756 15.753,-105.756 ; 14.457,-97.552 14.483,-97.552 ; 14.457,-97.527 14.483,-97.527 ; 14.457,-96.46 15.245,-96.46 ; 14.457,-96.384 16.464,-96.384 ; 14.457,-95.698 15.067,-95.698 ; 14.457,-95.088 16.464,-95.088 ; 14.457,-94.148 16.464,-94.148 ; 14.483,-100.448 16.464,-100.448 ; 14.483,-96.409 15.245,-96.409 ; 14.483,-95.723 15.169,-95.723 ; 14.483,-95.164 16.464,-95.164 ; 14.483,-95.139 16.464,-95.139 ; 14.483,-95.114 16.464,-95.114 ; 14.508,-100.422 16.464,-100.422 ; 14.508,-96.434 15.245,-96.434 ; 14.508,-95.774 15.245,-95.774 ; 14.508,-95.749 15.219,-95.749 ; 14.508,-95.19 16.464,-95.19 ; 14.508,-94.123 16.464,-94.123 ; 14.534,-97.323 14.661,-97.323 ; 14.534,-97.222 14.61,-97.222 ; 14.534,-95.825 15.067,-95.825 ; 14.534,-95.799 15.296,-95.799 ; 14.534,-95.215 16.464,-95.215 ; 14.559,-100.397 16.464,-100.397 ; 14.559,-95.85 15.042,-95.85 ; 14.559,-94.098 16.464,-94.098 ; 14.559,-90.618 16.464,-90.618 ; 14.584,-100.371 16.464,-100.371 ; 14.584,-95.876 15.016,-95.876 ; 14.584,-95.241 14.661,-95.241 ; 14.61,-100.346 16.464,-100.346 ; 14.61,-97.349 14.686,-97.349 ; 14.61,-95.266 14.686,-95.266 ; 14.61,-94.072 16.464,-94.072 ; 14.635,-100.321 16.464,-100.321 ; 14.635,-97.374 14.711,-97.374 ; 14.635,-97.298 14.661,-97.298 ; 14.635,-95.901 14.965,-95.901 ; 14.635,-95.444 14.711,-95.444 ; 14.661,-100.295 16.464,-100.295 ; 14.661,-97.196 15.499,-97.196 ; 14.661,-95.571 14.915,-95.571 ; 14.661,-95.545 14.889,-95.545 ; 14.661,-95.469 14.762,-95.469 ; 14.661,-95.291 14.737,-95.291 ; 14.661,-94.047 16.464,-94.047 ; 14.686,-100.27 16.464,-100.27 ; 14.686,-97.247 15.499,-97.247 ; 14.686,-97.222 15.499,-97.222 ; 14.686,-96.053 14.737,-96.053 ; 14.686,-95.952 14.94,-95.952 ; 14.686,-95.926 14.94,-95.926 ; 14.686,-95.495 14.813,-95.495 ; 14.686,-95.317 16.464,-95.317 ; 14.711,-97.273 15.524,-97.273 ; 14.711,-96.079 14.737,-96.079 ; 14.711,-95.977 14.965,-95.977 ; 14.711,-95.241 16.464,-95.241 ; 14.737,-100.244 16.464,-100.244 ; 14.737,-97.323 15.448,-97.323 ; 14.737,-97.298 15.524,-97.298 ; 14.737,-96.104 14.762,-96.104 ; 14.737,-96.028 15.042,-96.028 ; 14.737,-96.003 14.991,-96.003 ; 14.737,-95.52 14.864,-95.52 ; 14.737,-95.342 16.464,-95.342 ; 14.737,-94.021 16.464,-94.021 ; 14.737,-90.643 16.464,-90.643 ; 14.762,-100.219 16.464,-100.219 ; 14.762,-97.374 15.143,-97.374 ; 14.762,-97.349 15.448,-97.349 ; 14.762,-96.155 15.499,-96.155 ; 14.762,-96.13 14.864,-96.13 ; 14.762,-95.368 16.464,-95.368 ; 14.762,-95.266 16.464,-95.266 ; 14.788,-100.194 16.464,-100.194 ; 14.788,-97.425 15.169,-97.425 ; 14.788,-97.4 15.143,-97.4 ; 14.788,-95.291 16.464,-95.291 ; 14.788,-93.996 16.464,-93.996 ; 14.813,-100.168 16.464,-100.168 ; 14.813,-97.45 15.169,-97.45 ; 14.813,-95.393 16.464,-95.393 ; 14.838,-100.143 16.464,-100.143 ; 14.838,-100.117 16.464,-100.117 ; 14.838,-97.501 15.194,-97.501 ; 14.838,-97.476 15.169,-97.476 ; 14.838,-96.053 15.372,-96.053 ; 14.838,-95.672 14.991,-95.672 ; 14.838,-95.647 14.965,-95.647 ; 14.838,-95.418 14.94,-95.418 ; 14.838,-93.971 16.464,-93.971 ; 14.864,-100.092 16.464,-100.092 ; 14.864,-97.552 15.118,-97.552 ; 14.864,-97.527 15.118,-97.527 ; 14.864,-96.104 15.448,-96.104 ; 14.864,-96.079 15.397,-96.079 ; 14.864,-90.669 16.464,-90.669 ; 14.889,-103.496 16.464,-103.496 ; 14.889,-100.067 16.464,-100.067 ; 14.889,-97.603 15.118,-97.603 ; 14.889,-97.577 15.118,-97.577 ; 14.889,-96.13 15.473,-96.13 ; 14.889,-95.444 14.94,-95.444 ; 14.915,-100.041 16.464,-100.041 ; 14.915,-97.628 15.118,-97.628 ; 14.915,-93.945 16.464,-93.945 ; 14.94,-100.016 16.464,-100.016 ; 14.94,-97.679 15.016,-97.679 ; 14.94,-97.654 15.118,-97.654 ; 14.965,-99.99 16.464,-99.99 ; 14.965,-99.965 16.464,-99.965 ; 14.965,-97.781 15.016,-97.781 ; 14.965,-97.704 14.991,-97.704 ; 14.965,-93.92 16.464,-93.92 ; 14.991,-104.613 15.804,-104.613 ; 14.991,-99.94 16.464,-99.94 ; 14.991,-95.545 16.464,-95.545 ; 14.991,-95.52 16.464,-95.52 ; 14.991,-90.694 16.464,-90.694 ; 15.016,-99.914 16.464,-99.914 ; 15.016,-99.889 16.464,-99.889 ; 15.016,-95.418 16.464,-95.418 ; 15.016,-93.894 16.464,-93.894 ; 15.042,-99.863 16.464,-99.863 ; 15.042,-97.704 15.118,-97.704 ; 15.042,-97.679 15.118,-97.679 ; 15.042,-95.571 16.464,-95.571 ; 15.042,-95.444 16.464,-95.444 ; 15.067,-99.838 16.464,-99.838 ; 15.067,-99.813 16.464,-99.813 ; 15.067,-97.755 15.118,-97.755 ; 15.067,-97.73 15.118,-97.73 ; 15.067,-95.469 16.464,-95.469 ; 15.092,-99.787 16.464,-99.787 ; 15.092,-99.762 16.464,-99.762 ; 15.092,-95.596 16.464,-95.596 ; 15.092,-95.495 16.464,-95.495 ; 15.092,-93.869 16.464,-93.869 ; 15.092,-90.719 16.464,-90.719 ; 15.118,-99.736 16.464,-99.736 ; 15.118,-99.711 16.464,-99.711 ; 15.118,-95.622 16.464,-95.622 ; 15.143,-99.686 16.464,-99.686 ; 15.143,-99.66 16.464,-99.66 ; 15.143,-99.635 16.464,-99.635 ; 15.143,-97.527 15.194,-97.527 ; 15.143,-96.028 15.321,-96.028 ; 15.143,-96.003 15.245,-96.003 ; 15.143,-95.825 15.321,-95.825 ; 15.143,-93.844 16.464,-93.844 ; 15.169,-105.782 15.753,-105.782 ; 15.169,-99.609 16.464,-99.609 ; 15.169,-99.584 16.464,-99.584 ; 15.169,-99.559 16.464,-99.559 ; 15.169,-99.533 16.464,-99.533 ; 15.169,-97.552 15.194,-97.552 ; 15.169,-95.647 16.464,-95.647 ; 15.194,-99.508 16.464,-99.508 ; 15.194,-99.482 16.464,-99.482 ; 15.194,-99.457 16.464,-99.457 ; 15.194,-99.432 16.464,-99.432 ; 15.194,-99.406 16.464,-99.406 ; 15.194,-97.4 15.448,-97.4 ; 15.194,-97.374 15.448,-97.374 ; 15.194,-90.745 16.464,-90.745 ; 15.219,-99.381 16.464,-99.381 ; 15.219,-99.355 16.464,-99.355 ; 15.219,-99.33 16.464,-99.33 ; 15.219,-97.425 15.473,-97.425 ; 15.219,-95.672 16.464,-95.672 ; 15.219,-93.818 16.464,-93.818 ; 15.245,-99.305 16.464,-99.305 ; 15.245,-99.279 16.464,-99.279 ; 15.245,-97.45 15.473,-97.45 ; 15.245,-95.85 15.346,-95.85 ; 15.27,-99.254 16.464,-99.254 ; 15.27,-99.228 16.464,-99.228 ; 15.27,-97.501 15.473,-97.501 ; 15.27,-97.476 15.473,-97.476 ; 15.27,-95.698 16.464,-95.698 ; 15.27,-93.793 16.464,-93.793 ; 15.296,-99.203 16.464,-99.203 ; 15.296,-99.178 16.464,-99.178 ; 15.296,-97.527 15.473,-97.527 ; 15.296,-96.409 16.464,-96.409 ; 15.296,-95.723 16.464,-95.723 ; 15.321,-99.152 16.464,-99.152 ; 15.321,-97.577 15.499,-97.577 ; 15.321,-97.552 15.499,-97.552 ; 15.321,-95.876 15.372,-95.876 ; 15.321,-93.767 16.464,-93.767 ; 15.346,-99.127 16.464,-99.127 ; 15.346,-99.101 16.464,-99.101 ; 15.346,-97.628 15.499,-97.628 ; 15.346,-97.603 15.499,-97.603 ; 15.346,-96.434 16.464,-96.434 ; 15.346,-95.901 15.397,-95.901 ; 15.346,-95.749 16.464,-95.749 ; 15.372,-99.076 16.464,-99.076 ; 15.372,-99.051 16.464,-99.051 ; 15.372,-99.025 16.464,-99.025 ; 15.372,-97.704 15.524,-97.704 ; 15.372,-97.679 15.524,-97.679 ; 15.372,-97.654 15.524,-97.654 ; 15.372,-96.46 16.464,-96.46 ; 15.372,-95.926 15.397,-95.926 ; 15.372,-90.77 16.464,-90.77 ; 15.397,-99 16.464,-99 ; 15.397,-98.974 16.464,-98.974 ; 15.397,-98.949 16.464,-98.949 ; 15.397,-97.755 15.55,-97.755 ; 15.397,-97.73 15.524,-97.73 ; 15.397,-96.612 15.778,-96.612 ; 15.397,-96.587 15.778,-96.587 ; 15.397,-96.561 16.464,-96.561 ; 15.397,-96.536 16.464,-96.536 ; 15.397,-96.511 16.464,-96.511 ; 15.397,-96.485 16.464,-96.485 ; 15.397,-95.774 16.464,-95.774 ; 15.397,-93.742 16.464,-93.742 ; 15.423,-98.924 16.464,-98.924 ; 15.423,-98.898 16.464,-98.898 ; 15.423,-97.806 15.55,-97.806 ; 15.423,-97.781 15.55,-97.781 ; 15.423,-90.796 16.464,-90.796 ; 15.448,-98.873 16.464,-98.873 ; 15.448,-97.857 15.499,-97.857 ; 15.448,-97.831 15.499,-97.831 ; 15.448,-95.799 16.464,-95.799 ; 15.448,-93.717 16.464,-93.717 ; 15.473,-98.847 16.464,-98.847 ; 15.473,-97.908 15.499,-97.908 ; 15.473,-97.882 15.499,-97.882 ; 15.473,-97.349 15.524,-97.349 ; 15.473,-97.323 15.524,-97.323 ; 15.499,-98.822 16.464,-98.822 ; 15.499,-98.797 16.464,-98.797 ; 15.499,-98.771 16.464,-98.771 ; 15.499,-98.746 16.464,-98.746 ; 15.499,-98.72 16.464,-98.72 ; 15.499,-98.695 16.464,-98.695 ; 15.499,-98.67 15.575,-98.67 ; 15.499,-98.644 15.575,-98.644 ; 15.499,-98.619 15.575,-98.619 ; 15.499,-98.593 15.575,-98.593 ; 15.499,-98.568 15.575,-98.568 ; 15.499,-98.543 15.575,-98.543 ; 15.499,-98.517 15.575,-98.517 ; 15.499,-98.492 15.55,-98.492 ; 15.499,-98.466 15.55,-98.466 ; 15.499,-98.441 15.55,-98.441 ; 15.499,-98.416 15.55,-98.416 ; 15.499,-98.39 15.55,-98.39 ; 15.499,-98.365 15.55,-98.365 ; 15.499,-98.339 15.55,-98.339 ; 15.499,-98.314 15.524,-98.314 ; 15.499,-97.374 15.55,-97.374 ; 15.499,-95.825 16.464,-95.825 ; 15.499,-93.691 16.464,-93.691 ; 15.524,-97.425 15.55,-97.425 ; 15.524,-97.4 15.55,-97.4 ; 15.524,-95.85 15.6,-95.85 ; 15.524,-93.666 16.464,-93.666 ; 15.55,-97.603 15.6,-97.603 ; 15.55,-97.577 15.575,-97.577 ; 15.55,-96.104 15.651,-96.104 ; 15.55,-93.64 16.464,-93.64 ; 15.55,-90.821 16.464,-90.821 ; 15.575,-97.628 15.6,-97.628 ; 15.575,-96.13 15.702,-96.13 ; 15.575,-96.079 15.626,-96.079 ; 15.575,-95.876 15.6,-95.876 ; 15.6,-103.521 16.464,-103.521 ; 15.6,-98.67 16.464,-98.67 ; 15.6,-96.18 15.753,-96.18 ; 15.6,-96.155 15.727,-96.155 ; 15.6,-93.615 16.464,-93.615 ; 15.626,-98.644 16.464,-98.644 ; 15.626,-98.619 16.464,-98.619 ; 15.626,-98.593 16.464,-98.593 ; 15.626,-98.568 16.464,-98.568 ; 15.626,-98.543 16.464,-98.543 ; 15.626,-98.517 15.727,-98.517 ; 15.626,-98.492 15.702,-98.492 ; 15.626,-98.466 15.702,-98.466 ; 15.626,-98.441 15.677,-98.441 ; 15.626,-96.206 15.778,-96.206 ; 15.626,-93.59 16.464,-93.59 ; 15.651,-97.044 16.464,-97.044 ; 15.651,-97.019 16.464,-97.019 ; 15.651,-96.993 16.464,-96.993 ; 15.651,-96.968 16.464,-96.968 ; 15.651,-96.942 16.464,-96.942 ; 15.651,-96.231 15.778,-96.231 ; 15.651,-95.876 16.464,-95.876 ; 15.651,-95.85 16.464,-95.85 ; 15.651,-93.564 16.464,-93.564 ; 15.651,-93.539 16.464,-93.539 ; 15.677,-97.095 16.464,-97.095 ; 15.677,-97.069 16.464,-97.069 ; 15.677,-96.257 15.804,-96.257 ; 15.677,-95.901 16.464,-95.901 ; 15.677,-93.513 16.464,-93.513 ; 15.677,-90.846 16.464,-90.846 ; 15.702,-97.146 16.464,-97.146 ; 15.702,-97.12 16.464,-97.12 ; 15.702,-95.952 16.464,-95.952 ; 15.702,-95.926 16.464,-95.926 ; 15.702,-93.488 16.464,-93.488 ; 15.702,-93.463 16.464,-93.463 ; 15.727,-104.639 15.778,-104.639 ; 15.727,-97.196 16.464,-97.196 ; 15.727,-97.171 16.464,-97.171 ; 15.727,-95.977 16.464,-95.977 ; 15.727,-93.437 16.464,-93.437 ; 15.753,-98.517 16.464,-98.517 ; 15.753,-98.492 16.464,-98.492 ; 15.753,-98.466 16.464,-98.466 ; 15.753,-98.441 16.464,-98.441 ; 15.753,-98.416 16.464,-98.416 ; 15.753,-98.39 16.464,-98.39 ; 15.753,-98.365 16.464,-98.365 ; 15.753,-97.273 16.464,-97.273 ; 15.753,-97.247 16.464,-97.247 ; 15.753,-97.222 16.464,-97.222 ; 15.753,-96.028 16.464,-96.028 ; 15.753,-96.003 16.464,-96.003 ; 15.753,-93.412 16.464,-93.412 ; 15.753,-93.386 16.464,-93.386 ; 15.778,-98.339 16.464,-98.339 ; 15.778,-98.238 15.829,-98.238 ; 15.778,-98.212 15.829,-98.212 ; 15.778,-97.603 16.464,-97.603 ; 15.778,-97.374 16.464,-97.374 ; 15.778,-97.349 16.464,-97.349 ; 15.778,-97.323 16.464,-97.323 ; 15.778,-97.298 16.464,-97.298 ; 15.778,-96.079 16.464,-96.079 ; 15.778,-96.053 16.464,-96.053 ; 15.778,-93.361 16.464,-93.361 ; 15.778,-93.336 16.464,-93.336 ; 15.778,-93.31 16.464,-93.31 ; 15.778,-90.872 16.464,-90.872 ; 15.804,-98.314 16.464,-98.314 ; 15.804,-98.289 16.464,-98.289 ; 15.804,-98.263 16.464,-98.263 ; 15.804,-98.187 15.829,-98.187 ; 15.804,-97.679 16.464,-97.679 ; 15.804,-97.654 16.464,-97.654 ; 15.804,-97.628 16.464,-97.628 ; 15.804,-97.577 16.464,-97.577 ; 15.804,-97.476 16.464,-97.476 ; 15.804,-97.45 16.464,-97.45 ; 15.804,-97.425 16.464,-97.425 ; 15.804,-97.4 16.464,-97.4 ; 15.804,-96.587 16.058,-96.587 ; 15.804,-96.104 16.464,-96.104 ; 15.804,-93.285 16.464,-93.285 ; 15.804,-93.259 16.464,-93.259 ; 15.829,-98.085 16.464,-98.085 ; 15.829,-98.06 16.464,-98.06 ; 15.829,-98.035 16.464,-98.035 ; 15.829,-98.009 16.464,-98.009 ; 15.829,-97.984 16.464,-97.984 ; 15.829,-97.755 16.464,-97.755 ; 15.829,-97.73 16.464,-97.73 ; 15.829,-97.704 16.464,-97.704 ; 15.829,-97.552 16.464,-97.552 ; 15.829,-97.527 16.464,-97.527 ; 15.829,-97.501 16.464,-97.501 ; 15.829,-96.155 16.464,-96.155 ; 15.829,-96.13 16.464,-96.13 ; 15.829,-93.234 16.464,-93.234 ; 15.829,-93.209 16.464,-93.209 ; 15.829,-90.897 16.464,-90.897 ; 15.854,-98.238 16.464,-98.238 ; 15.854,-98.187 16.464,-98.187 ; 15.854,-98.162 16.464,-98.162 ; 15.854,-98.136 16.464,-98.136 ; 15.854,-98.111 16.464,-98.111 ; 15.854,-97.958 16.464,-97.958 ; 15.854,-97.831 16.464,-97.831 ; 15.854,-97.806 16.464,-97.806 ; 15.854,-97.781 16.464,-97.781 ; 15.854,-96.612 16.464,-96.612 ; 15.854,-96.18 16.464,-96.18 ; 15.854,-93.183 16.464,-93.183 ; 15.854,-93.158 16.464,-93.158 ; 15.88,-98.212 16.464,-98.212 ; 15.88,-97.933 16.464,-97.933 ; 15.88,-97.908 16.464,-97.908 ; 15.88,-97.882 16.464,-97.882 ; 15.88,-97.857 16.464,-97.857 ; 15.88,-96.739 16.464,-96.739 ; 15.88,-96.663 16.464,-96.663 ; 15.88,-96.638 16.464,-96.638 ; 15.88,-96.231 16.464,-96.231 ; 15.88,-96.206 16.464,-96.206 ; 15.88,-93.132 16.464,-93.132 ; 15.88,-93.107 16.464,-93.107 ; 15.88,-90.923 16.464,-90.923 ; 15.905,-96.714 16.464,-96.714 ; 15.905,-96.688 16.464,-96.688 ; 15.905,-96.257 16.464,-96.257 ; 15.905,-93.082 16.464,-93.082 ; 15.905,-90.948 16.464,-90.948 ; 15.931,-96.307 16.464,-96.307 ; 15.931,-96.282 16.464,-96.282 ; 15.931,-93.056 16.464,-93.056 ; 15.931,-93.031 16.464,-93.031 ; 15.931,-90.973 16.464,-90.973 ; 15.956,-96.333 16.464,-96.333 ; 15.956,-93.005 16.464,-93.005 ; 15.956,-90.999 16.464,-90.999 ; 15.981,-92.98 16.464,-92.98 ; 15.981,-92.955 16.464,-92.955 ; 15.981,-91.05 16.464,-91.05 ; 15.981,-91.024 16.464,-91.024 ; 16.007,-92.929 16.464,-92.929 ; 16.007,-91.075 16.464,-91.075 ; 16.032,-92.904 16.464,-92.904 ; 16.032,-92.878 16.464,-92.878 ; 16.032,-91.126 16.464,-91.126 ; 16.032,-91.1 16.464,-91.1 ; 16.058,-92.853 16.464,-92.853 ; 16.058,-92.828 16.464,-92.828 ; 16.058,-91.151 16.464,-91.151 ; 16.083,-96.587 16.464,-96.587 ; 16.083,-92.802 16.464,-92.802 ; 16.083,-92.777 16.464,-92.777 ; 16.083,-91.177 16.464,-91.177 ; 16.108,-92.751 16.464,-92.751 ; 16.108,-92.726 16.464,-92.726 ; 16.108,-91.202 16.464,-91.202 ; 16.134,-92.701 16.464,-92.701 ; 16.134,-92.675 16.464,-92.675 ; 16.134,-91.227 16.464,-91.227 ; 16.159,-92.65 16.464,-92.65 ; 16.159,-92.624 16.464,-92.624 ; 16.159,-92.599 16.464,-92.599 ; 16.159,-91.278 16.464,-91.278 ; 16.159,-91.253 16.464,-91.253 ; 16.185,-92.574 16.464,-92.574 ; 16.185,-92.548 16.464,-92.548 ; 16.185,-91.304 16.464,-91.304 ; 16.21,-92.523 16.464,-92.523 ; 16.21,-92.497 16.464,-92.497 ; 16.21,-92.472 16.464,-92.472 ; 16.21,-91.329 16.464,-91.329 ; 16.235,-92.447 16.464,-92.447 ; 16.235,-92.421 16.464,-92.421 ; 16.235,-91.354 16.464,-91.354 ; 16.261,-92.396 16.464,-92.396 ; 16.261,-92.37 16.464,-92.37 ; 16.261,-92.345 16.464,-92.345 ; 16.261,-91.405 16.464,-91.405 ; 16.261,-91.38 16.464,-91.38 ; 16.286,-92.32 16.464,-92.32 ; 16.286,-92.294 16.464,-92.294 ; 16.286,-91.431 16.464,-91.431 ; 16.312,-92.269 16.464,-92.269 ; 16.312,-92.243 16.464,-92.243 ; 16.312,-92.218 16.464,-92.218 ; 16.312,-91.456 16.464,-91.456 ; 16.337,-103.546 16.464,-103.546 ; 16.337,-92.193 16.464,-92.193 ; 16.337,-92.167 16.464,-92.167 ; 16.337,-91.507 16.464,-91.507 ; 16.337,-91.481 16.464,-91.481 ; 16.362,-106.391 16.464,-106.391 ; 16.362,-106.366 16.464,-106.366 ; 16.362,-106.34 16.464,-106.34 ; 16.362,-106.315 16.464,-106.315 ; 16.362,-106.29 16.464,-106.29 ; 16.362,-106.264 16.464,-106.264 ; 16.362,-106.239 16.464,-106.239 ; 16.362,-106.213 16.464,-106.213 ; 16.362,-106.188 16.464,-106.188 ; 16.362,-106.163 16.464,-106.163 ; 16.362,-106.137 16.464,-106.137 ; 16.362,-106.112 16.464,-106.112 ; 16.362,-92.142 16.464,-92.142 ; 16.362,-92.116 16.464,-92.116 ; 16.362,-91.558 16.464,-91.558 ; 16.362,-91.532 16.464,-91.532 ; 16.388,-106.086 16.464,-106.086 ; 16.388,-106.061 16.464,-106.061 ; 16.388,-106.036 16.464,-106.036 ; 16.388,-106.01 16.464,-106.01 ; 16.388,-105.985 16.464,-105.985 ; 16.388,-105.959 16.464,-105.959 ; 16.388,-105.934 16.464,-105.934 ; 16.388,-105.909 16.464,-105.909 ; 16.388,-105.883 16.464,-105.883 ; 16.388,-105.858 16.464,-105.858 ; 16.388,-105.832 16.464,-105.832